# Altium PCB SportsLight.PcbDoc
Units mm, origin at the board's own origin, x right, y up, seen from the top; angles counter-clockwise.
Board outline 49.5 x 30 mm, 2 copper layers (Top Layer, Bottom Layer); 64 components, 41 nets, 217 pads, 71 vias.
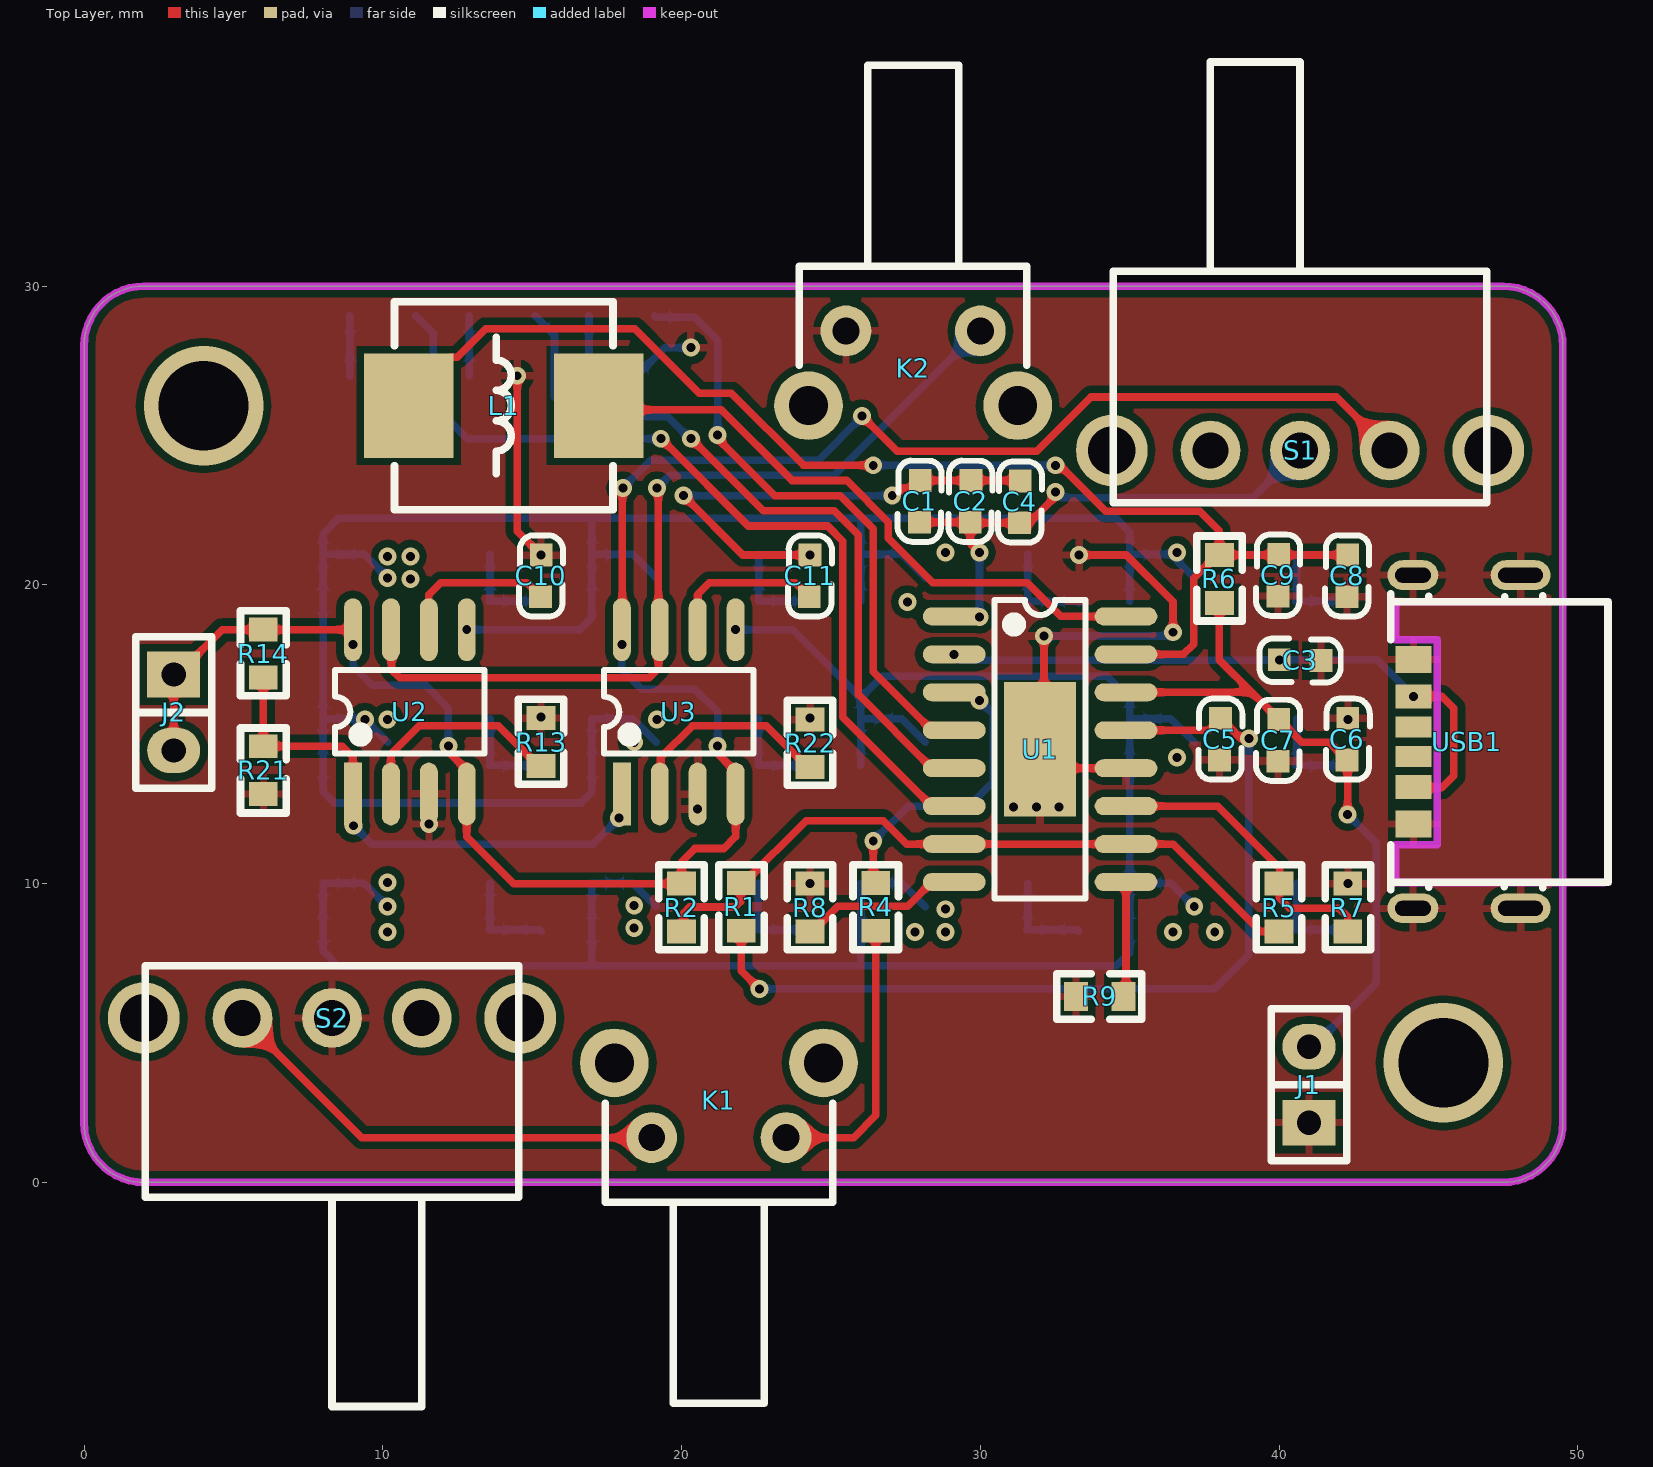
[diagram p0: Top Layer view]
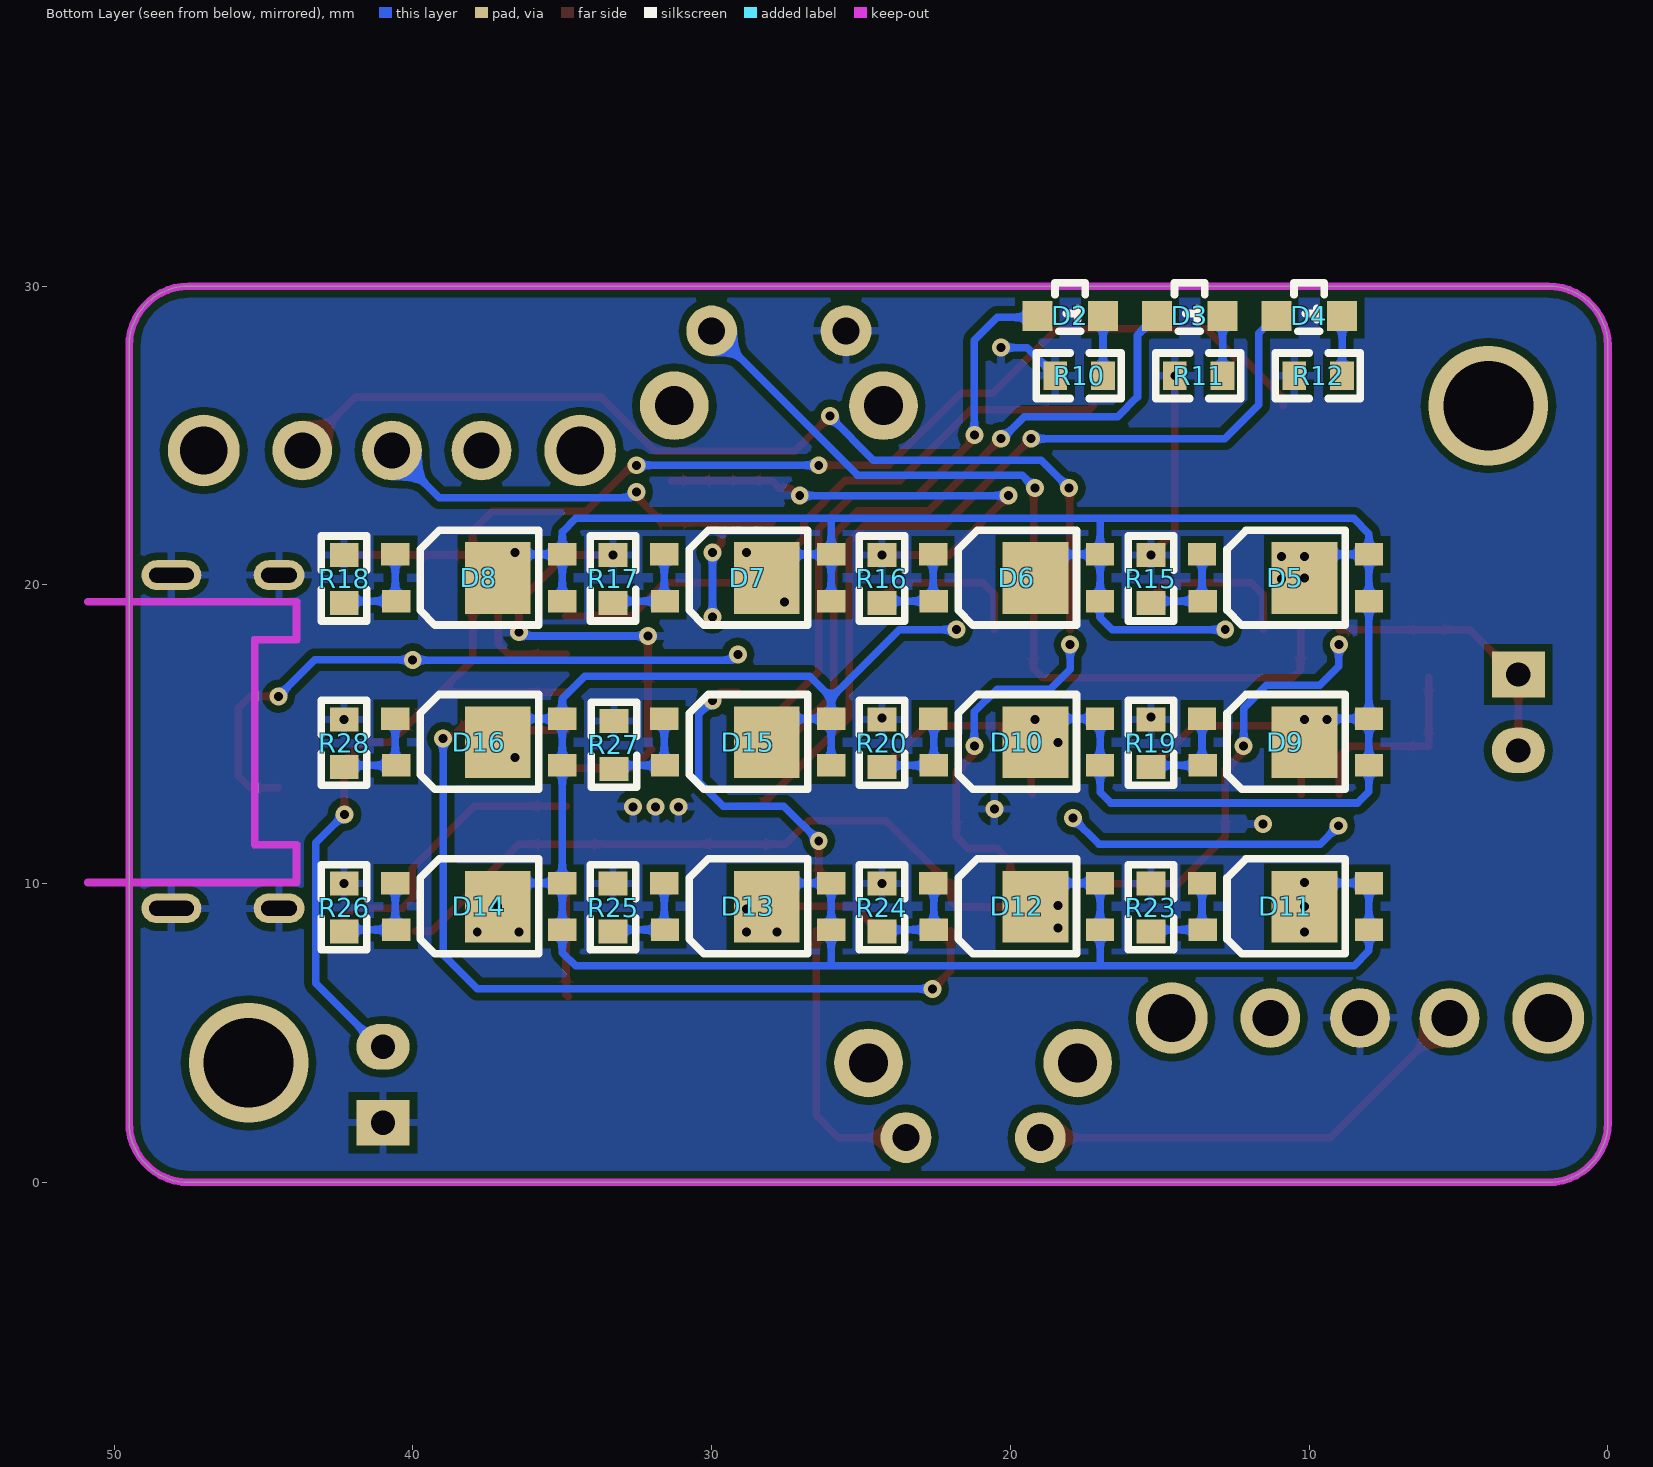
[diagram p1: Bottom Layer view, seen from below]
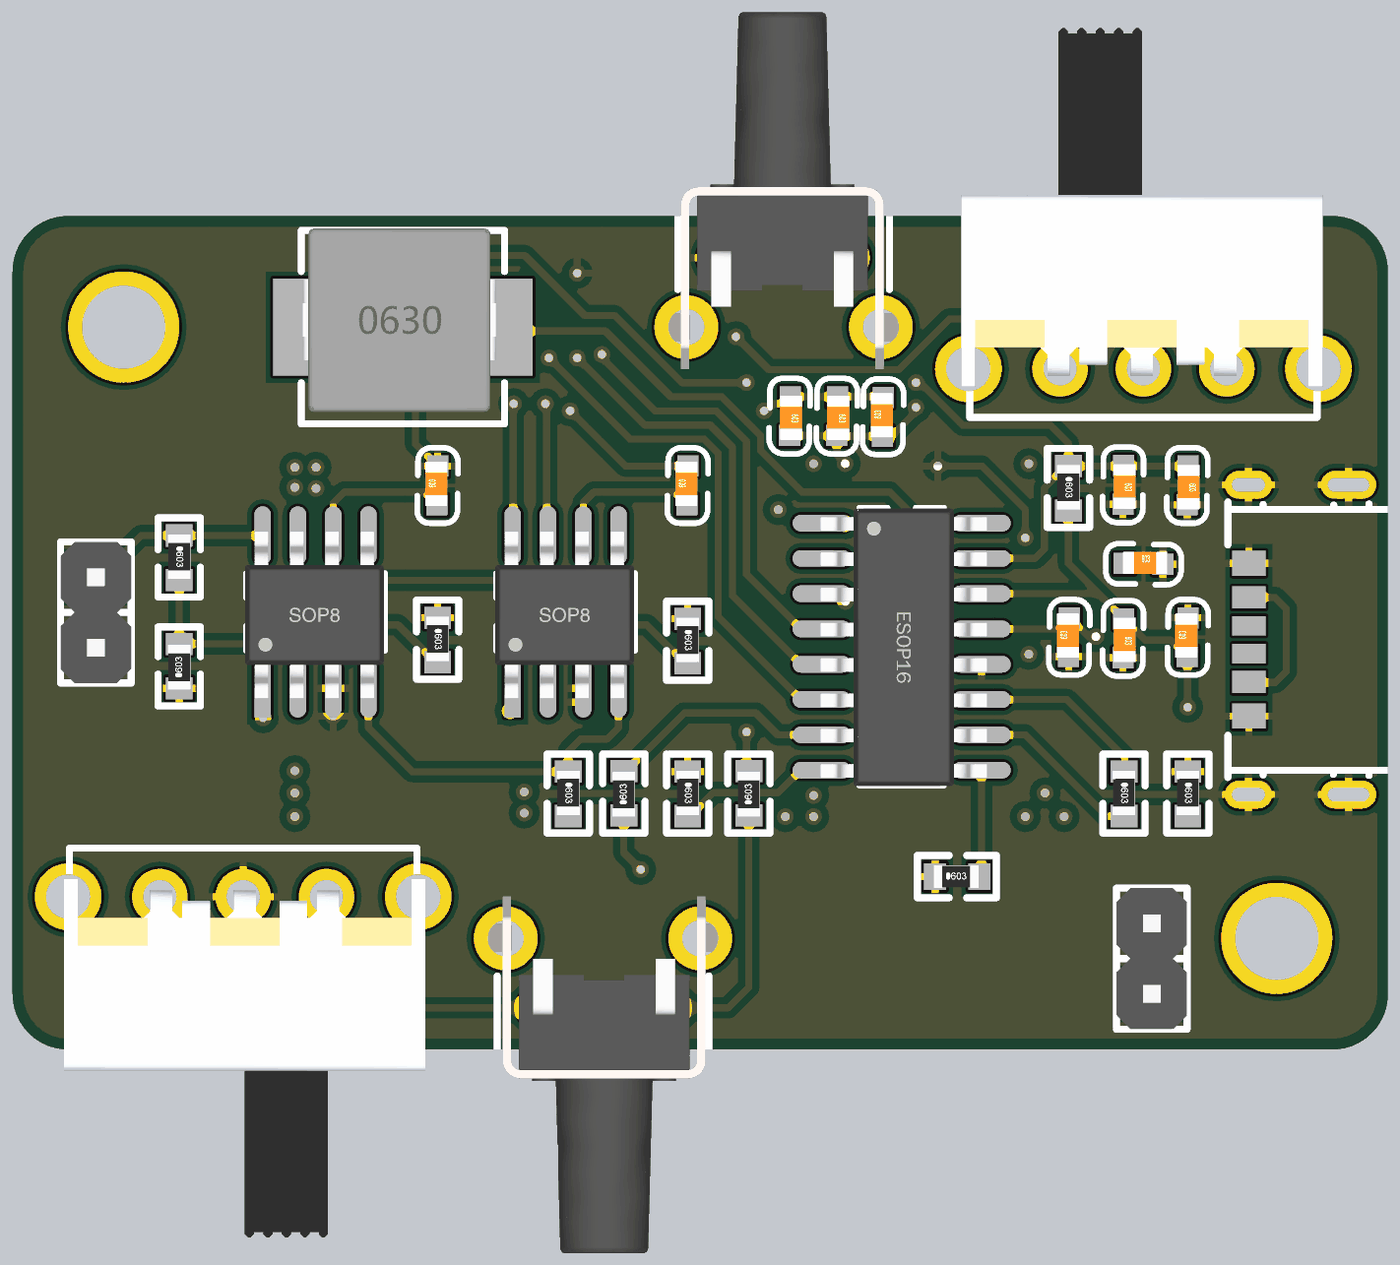
[diagram p2: 3D render of the assembled board from above, using the file's embedded part models]
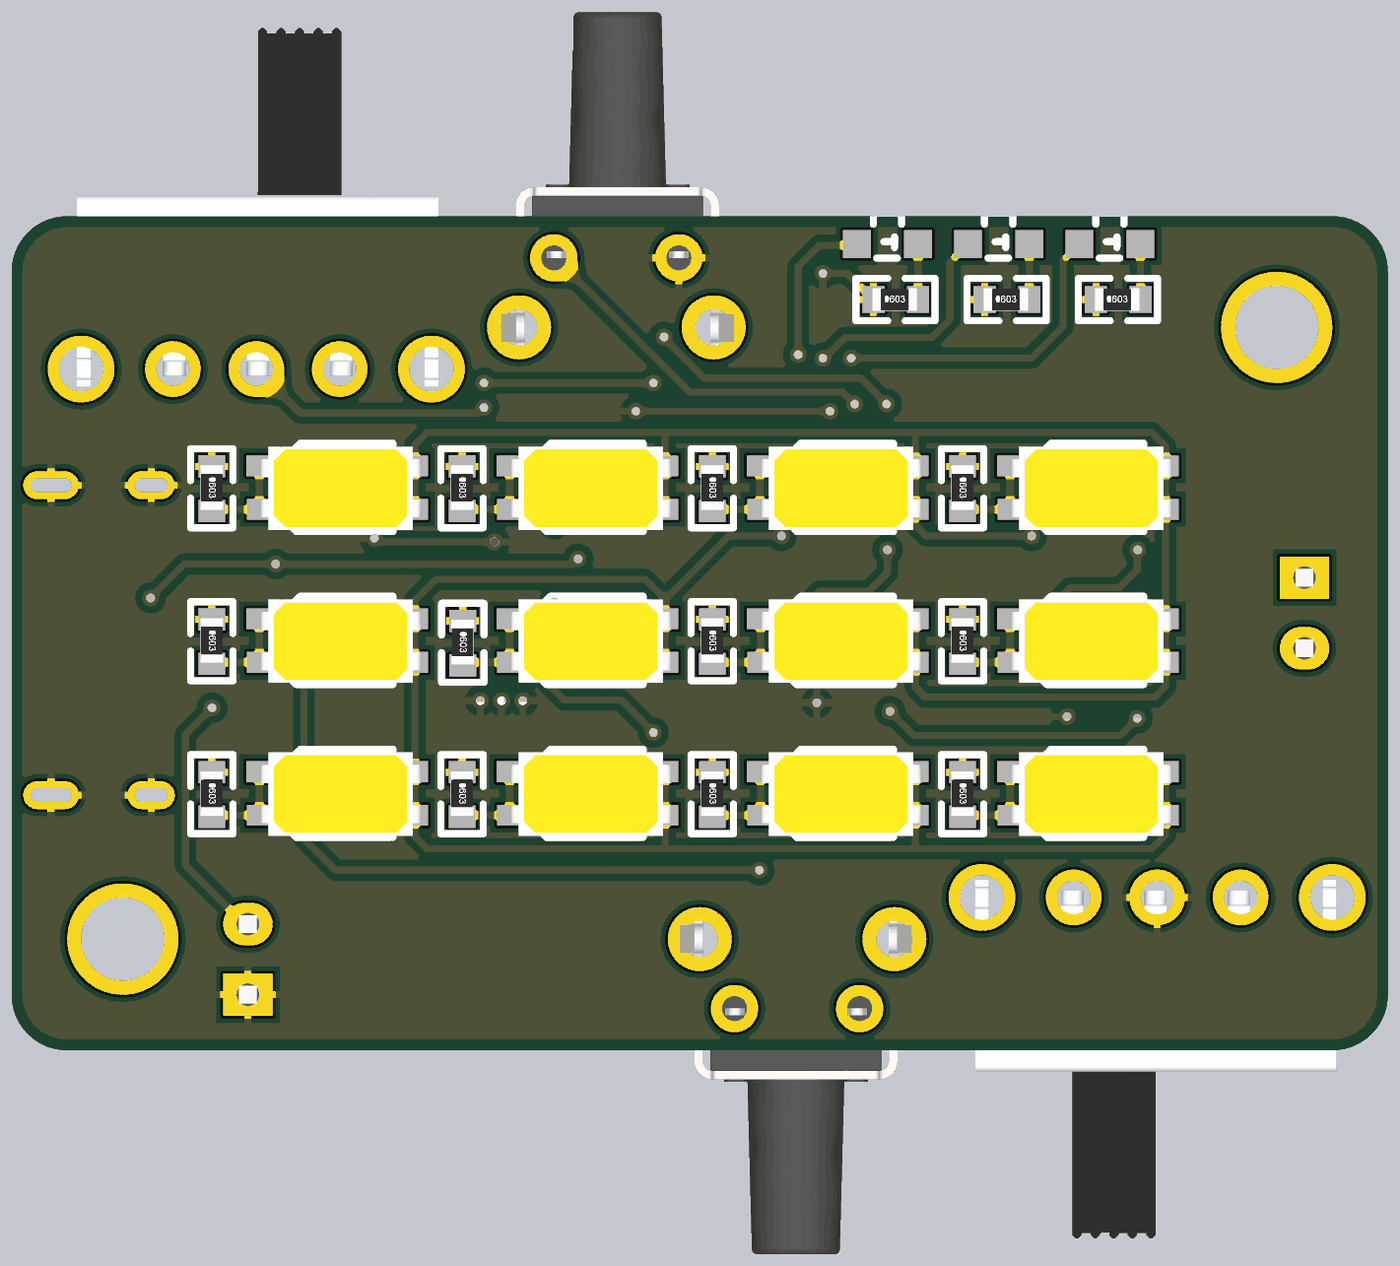
[diagram p3: 3D render of the assembled board from below, using the file's embedded part models]

## Layer stack, top to bottom
Top Solder: solder mask 0.0102, Solder Resist, Dk 3.5
Top Layer: signal copper 0.0356
Dielectric 1: dielectric 0.32, FR-4, Dk 4.8
Bottom Layer: signal copper 0.0356
Bottom Solder: solder mask 0.0102, Solder Resist, Dk 3.5

## Board outline
0,2 0,28 cw(c2,28) 2,30 47.5,30 cw(c47.5,28) 49.5,28 49.5,2 cw(c47.5,2) 47.5,0 2,0 cw(c2,2)

## Design rules (kind name [scope] priority, off if disabled: settings)
Clearance [All] p1: gap=0.254 ignorepadtopadclearanceinfootprint=FALSE except(0: Arc-Hole Track-Hole SMDPad-Hole THPad-Hole Via-Hole Fill-Hole Poly-Hole Region-Hole Text-Hole)
DiffPairsRouting [All] p1: maxlimit=0.254 minlimit=0.089 mostfreqgap=0.254 toplayer_minwidth=0.089 toplayer_maxwidth=0.381 toplayer_prefwidth=0.381 bottomlayer_minwidth=0.089 bottomlayer_maxwidth=0.381 bottomlayer_prefwidth=0.381 maxuncoupledlength=12.7
HoleSize [All] p1: absolutevalues=TRUE maxlimit=6.3 minlimit=0.2 maxpercent=80.000 minpercent=20.000
MinimumSolderMaskSliver [All] p1: minsoldermaskwidth=0
NetAntennae [InNet('No Net')] p1: netantennaetolerance=0
PolygonConnect [All] p1: connectstyle=Relief reliefconductorwidth=0.254 reliefentries=4 polygonreliefangle="90 Angle" airgapwidth=0.254
RoutingVias [All] p1: holewidth=0.711 width=1.27 viastyle="Through Hole" minholewidth=0.3 minwidth=0.5 maxholewidth=6.3 maxwidth=6.5
SilkToSolderMaskClearance [IsPad] p1: minsilkscreentomaskgap=0 clearancetoexposedcopper=TRUE
SolderMaskExpansion [All] p1: expansion=0.102
Width [All] p1: maxlimit=0.762 minlimit=0.089 preferedwidth=0.254
25 further rules are at their usual default settings.

## Components (designator, comment, footprint, x,y, rotation, side; value= is the part's Value field where it differs from the comment)
C1 "22uF" 0603C 28,23.5 r270 top locked
C2 "22uF" 0603C 29.7,23.5 r270 top
C3 "10uF" 0603C 40,17.5 r0 top
C4 "10uF" 0603C 31.3,22.071 r90 top locked
C5 "2.2uF" 0603C 38,14.136 r90 top locked
C6 "10uF" 0603C 42.266,14.136 r90 top
C7 "0.1uF" 0603C 40,15.5 r270 top locked
C8 "0.1uF" 0603C 42.309,21.005 r270 top
C9 "10uF" 0603C 40,21.024 r270 top
C10 "MODE" 0603C 15.266,19.598 r90 top
C11 "MODE" 0603C 24.266,19.598 r90 top
D2 "LED" LED-0602-RD 18,29 r180 bottom locked
D3 "LED" LED-0602-RD 14,29 r180 bottom locked
D4 "LED" LED-0602-RD 10,29 r180 bottom locked
D5 "LED-5630" LED-5630W 8,21 r180 bottom locked
D6 "LED-5630" LED-5630W 17,21 r180 bottom locked
D7 "LED-5630" LED-5630W 26,21 r180 bottom locked
D8 "LED-5630" LED-5630W 35,21 r180 bottom locked
D9 "LED-5630" LED-5630W 8,15.5 r180 bottom locked
D10 "LED-5630" LED-5630W 17,15.5 r180 bottom locked
D11 "LED-5630" LED-5630W 8,10 r180 bottom locked
D12 "LED-5630" LED-5630W 17,10 r180 bottom locked
D13 "LED-5630" LED-5630W 26,10 r180 bottom locked
D14 "LED-5630" LED-5630W 35,10 r180 bottom locked
D15 "LED-5630" LED-5630W 26,15.5 r180 bottom locked
D16 "LED-5630" LED-5630W 35,15.5 r180 bottom locked
J1 "BAT" "Pin HDR1X2/2.54mm-S" 41,2 r180 top
J2 "CE" "Pin HDR1X2/2.54mm-S" 3,17 r0 top locked
K1 "KEY" DIP-6X6X10_C 19,1.5 r0 top locked
K2 "KEY" DIP-6X6X10_C 30,28.5 r180 top locked
L1 "1uH" 0630L 11,26 r0 top locked
R1 "0R" 0603R 22,8.425 r90 top
R2 "0R" 0603R 20,10 r270 top
R4 "10K" 0603R 26.5,8.425 r90 top locked
R5 "MODE" 0603R 40,10 r270 top locked
R6 "10mR" 0603R 38,21 r270 top locked
R7 "MODE" 0603R 42.3,10 r270 top
R8 "MODE" 0603R 24.3,10 r270 top
R9 "MODE" 0603R 33.198,6.223 r0 top
R10 "100R" 0603R 18.5,27 r180 bottom locked
R11 "100R" 0603R 14.5,27 r180 bottom locked
R12 "100R" 0603R 10.5,27 r180 bottom locked
R13 "MODE" 0603R 15.3,15.538 r270 top
R14 "MODE" 0603R 6,18.5 r270 top locked
R15 "MODE" 0603R 15.3,21 r270 bottom locked
R16 "MODE" 0603R 24.3,21 r270 bottom locked
R17 "MODE" 0603R 33.3,21 r270 bottom locked
R18 "MODE" 0603R 42.3,21 r270 bottom locked
R19 "MODE" 0603R 15.3,15.5 r270 bottom locked
R20 "MODE" 0603R 24.3,15.5 r270 bottom locked
R21 "MODE" 0603R 6,13 r90 top locked
R22 "MODE" 0603R 24.3,15.5 r270 top
R23 "MODE" 0603R 15.3,10 r270 bottom locked
R24 "MODE" 0603R 24.3,10 r270 bottom locked
R25 "MODE" 0603R 33.3,10 r270 bottom locked
R26 "MODE" 0603R 42.3,10 r270 bottom locked
R27 "MODE" 0603R 33.274,15.443 r270 bottom
R28 "MODE" 0603R 42.3,15.5 r270 bottom locked
S1 "SS-12F23" SS-12F23 47,24.5 r180 top locked
S2 "SS-12F23" SS-12F23 2,5.5 r0 top locked
U1 "IP5506" ESOP16 32,14.5 r0 top locked
U2 "CN5730" SOP8 9,13 r90 top locked
U3 "CN5730" SOP8 18,13 r90 top locked
USB1 "USB-C 6P CB0.8(073)" USB-C-SMD_TYPE-C-6P-CB0.8-073 44.5,12 r90 top locked

## Footprints (in the part's own frame and the unit in brackets; to place one, negate y for a bottom-side part, rotate by r counter-clockwise, add the part's x,y. Pads: shape width x height; smd on the part's side, far side on the other; paste and mask are expansions set on the pad)
0603C [mil]
  rect 30x30 smd: 1(0.21,-0.35) 2(55.21,-1.35)
  silkscreen extent -26,-30 81,28, body extent -1,-15 62,17, height 12
0603R [mm]
  rect 0.8x0.965 smd: 1(0,0) 2(1.6,0)
  silkscreen extent -0.64,-0.76 2.21,0.76, body extent -0.04,-0.41 1.56,0.41, height 0.45
0630L [mm]
  rect 3x3.5 smd: 1(-0.127,0) 2(6.223,0)
  silkscreen extent -0.61,-3.48 6.71,3.48, body extent -0.55,-3.05 6.4,3.55, height 3.05
DIP-6X6X10_C [mm]
  round 2.3 hole 1.3: 0(-1.25,2.5) 0(5.75,2.5)
  round 1.7 hole 0.9: 1(0,0) 3(4.5,0)
  silkscreen extent -1.56,-8.89 6.06,1.14, body extent -1.89,-8.84 6.48,4.01, height 7.47
ESOP16 [mm]
  oval 2.1x0.6 smd: 1(-2.875,4.445) 2(-2.875,3.175) 3(-2.875,1.905) 4(-2.875,0.635) 5(-2.875,-0.635) 6(-2.875,-1.905) 7(-2.875,-3.175) 8(-2.875,-4.445) 9(2.875,-4.445) 10(2.875,-3.175) 11(2.875,-1.905) 12(2.875,-0.635) 13(2.875,0.635) 14(2.875,1.905) 15(2.875,3.175) 16(2.875,4.445)
  rect 0.9x0.7 on Top Paste: 10(-0.625,-0.575) 10(-0.625,0.525) 10(-0.625,1.625) 10(0.625,-1.625) 11(-0.65,-1.625) 11(0.65,-0.575) 11(0.65,0.525) 11(0.65,1.625)
  rect 2.4x4.5 smd paste-3: 17(0,0)
  silkscreen extent -1.52,-5 1.52,5, body extent -2.93,-5.03 3.08,4.97, height 1.53
LED-0602-RD [mm]
  rect 1x1 smd: 1(-1.1,0) 2(1.1,0)
  silkscreen extent -0.51,-0.51 0.51,1.11
LED-5630W [mm]
  rect 2.2x2.4 smd: A(-2.159,-0.768)
  rect 0.95x0.75 smd: A(0,-1.543) A(0,0.019) K(-5.588,0.019) K(-5.563,-1.543)
  silkscreen extent -4.75,-2.34 -0.79,0.83, body extent -5.57,-2.29 0.23,0.71, height 0.95
"Pin HDR1X2/2.54mm-S" [mil]
  rect 70x60 hole 32: 1(0,0)
  oval 70x60 hole 32: 2(0,-100)
  silkscreen extent -50,-150 50,50, body extent -50,-150 50,50, height 336
SOP8 [mm]
  rect 2.1x0.6 smd: 1(0,0)
  oval 2.1x0.6 smd: 2(0,-1.27) 3(0,-2.54) 4(0,-3.81) 5(5.5,-3.81) 6(5.5,-2.54) 7(5.5,-1.27) 8(5.5,0)
  silkscreen extent 1.35,-4.41 4.15,0.6, body extent -0.36,-4.37 5.64,0.63, height 1.9
SS-12F23 [mm]
  round 2.4 hole 1.6: 0(0,0) 0(12.6,0)
  round 2 hole 1.2: 1(3.3,0) 2(6.3,0) 3(9.3,0)
  silkscreen extent 0.05,-13 12.55,1.75, body extent -0.14,-12.27 12.86,0.64, height 5.75
USB-C-SMD_TYPE-C-6P-CB0.8-073 [mm]
  rect 0.9x1.2 smd: 1(0,0) 6(5.5,0)
  rect 0.8x1.2 smd: 2(1.23,0) 5(4.27,0)
  rect 0.7x1.2 smd: 3(2.25,0) 4(3.25,0)
  oval 1x1.7 hole 0.5 slot 1.2 at 90 deg: 7(-2.825,0.02) 8(8.325,0.02)
  oval 1x2 hole 0.5 slot 1.5 at 90 deg: 7(-2.825,-3.58) 8(8.325,-3.58)
  Keep-Out Layer lines w0.254: -1.962,-6.38 -1.962,0.605 -0.692,0.605 -0.692,-0.792 6.166,-0.792 6.166,0.605 7.436,0.605 7.436,-6.38
  silkscreen extent -2.21,-6.51 7.71,0.76

## Part data
C1 C2 C3 C4 C5 C6 C7 C8 C9 C10 C11: library part CAP, "无极性电容"
J1 J2: library part "Pin HDR1X2"
L1: library part INDUCTOR, "INDUCTOR"
R1 R2 R4 R5 R6 R7 R10 R11 R12 R13 R14 R15 R16 R17 R18 R19 R20 R21 R22 R23 R24 R25 R26 R27 R28: library part RES
R8: library part RES, "用于设置电池容量"
R9: library part RES, "用于设置按键功能、照明"
U1: "集成数码管驱动的2A充电2.4A放电移动电源SOC"
U2 U3: "LED集成驱动电路"
USB1: BOM_Manufacturer="SHOU HAN(Ê×º", BOM_Manufacturer Part="TYPE-C 6P CB0.8(073)", BOM_Supplier=LCSC, BOM_Supplier Part=C2858273, Contributor=LCSC, spicePre=U, spiceSymbolName="TYPE-C 6P CB0.8(073)"

## Via types
v1: diameter 0.6, hole 0.3, Top Layer to Bottom Layer, 69 vias
v2: diameter 4, hole 3, Top Layer to Bottom Layer, 2 vias

## Nets (pads, with @x,y where several pads share a name; then routed paths per layer and width w, separated by ;. In a path a pad name is that pad's centre, name@x,y a point inside that pad or via, vN(x,y) a via of type N, cw(c..) or ccw(c..) an arc to the next point about the centre after c; other vN are vias at no path point)
BTN: K2.1 U2.7 U3.7 | length 29.6
  Top Layer w0.254: U2.7 10.287,18.483 10.287,17.167 10.563,16.891 18.923,16.891 19.223,17.191 19.223,23.195 v1(19.177,23.241)
  Bottom Layer w0.254: v1(19.177,23.241) 19.604,23.668 25.118,23.668 29.95,28.5 K2.1
CE0: J2.1 J2.2 R2.1 R14.1 S1.1 U2.4 U2.8 U3.4 U3.8 | length 71.4
  Top Layer w0.254: J2.2 J2.1 3.127,17 4.627,18.5 R14.1 U2.8 ; v1(12.192,14.605) 12.192,14.423 12.81,13.805 U2.4 12.81,11.574 14.384,10 R2.1 20,10.729 20.447,11.176 21.407,11.176 21.81,11.579 U3.4 21.81,13.75 21.209,14.351 v1(21.209,14.605) ; U3.8 18.017,18.517 18.017,23.224 v1(18.034,23.241) ; v1(26.035,25.654) 27.22,24.469 31.884,24.469 33.704,26.289 41.911,26.289 S1.1
  Bottom Layer w0.254: v1(9,18) 9.017,17.983 9.017,17.272 9.652,16.637 11.43,16.637 12.192,15.875 v1(12.192,14.605) ; v1(18,18) 18,17.179 18.669,16.51 20.447,16.51 21.209,15.748 v1(21.209,14.605) ; v1(18.034,23.241) 18.969,24.176 24.591,24.176 26.035,25.62 v1(26.035,25.654)
GND: C1.1 C2.1 C3.2 C4.2 C5.1 C6.2 C7.2 C8.2 C9.2 C10.2 C11.2 J1.1 K2.3 R7.1 R8.1 R9.1 R10.1 R11.1 R12.1 R13.1 R15.1 R16.1 R17.1 R18.1 R19.1 R20.1 R21.1 R22.1 R23.1 R24.1 R25.1 R26.1 R27.1 R28.1 S2.2 U1.12 U1.17 U2.3 U3.3 USB1.1 USB1.6 USB1.7 USB1.8 | length 41.3
  Top Layer w0.254: v1(14.5,27) 14.5,21.8 v1(15.3,21) ; v1(20.066,22.987) 22.053,21 v1(24.3,21) ; v1(27.051,22.987) 27.145,22.987 27.398,23.241 27.737,23.241 C1.1 C2.1 31.313,23.495 C4.2 ; v1(32.131,18.288) 32.131,14.631 U1.17 32.635,13.865 U1.12 ; v1(33.3,21) 34.88,21 36.449,19.431 v1(36.449,18.415)
  Bottom Layer w0.254: R10.1 19.44,27.94 v1(20.32,27.94) ; v1(20.066,22.987) v1(27.051,22.987) ; v1(32.131,18.288) 36.322,18.288 v1(36.449,18.415)
  other v1: 24.3,10 42.3,10 11.54,12 20.54,12.5 31.115,12.573 31.877,12.573 32.639,12.573 42.3,15.5 24.3,15.538 15.3,15.576
LED4: D3.1 U1.5 | length 24.6
  Top Layer w0.254: v1(20.32,24.892) 22.733,22.479 25.102,22.479 25.908,21.673 25.908,16.332 28.375,13.865 U1.5
  Bottom Layer w0.254: D3.1 15.748,28.352 15.748,26.289 16.403,25.634 19.535,25.634 20.276,24.892 v1(20.32,24.892)
LED5: D2.1 U1.4 | length 20.5
  Top Layer w0.254: v1(21.209,25.019) 21.209,24.892 23.114,22.987 25.313,22.987 26.416,21.884 26.416,17.094 28.375,15.135 U1.4
  Bottom Layer w0.254: D2.1 19.144,28.956 20.447,28.956 21.209,28.194 v1(21.209,25.019)
MODE: R14.2 R21.2 U2.1 U3.1 | length 16.2
  Top Layer w0.254: R14.2 R21.2 8.641,14.6 9,14.241 U2.1
  Bottom Layer w0.254: v1(9.017,11.938) 9.636,11.319 17.034,11.319 v1(17.907,12.192)
NetC1_2: C1.2 C2.2 C4.1 S1.2 U1.1 | length 17.3
  Top Layer w0.254: C1.2 C2.2 ; v1(29.966,21.088) 29.966,21.097 29.666,21.397 C2.2 ; v1(32.512,23.114) 32.512,22.948 31.641,22.076 C4.1 29.687,22.076 C2.2
  Bottom Layer w0.254: v1(29.966,21.088) 29.972,21.082 v1(29.972,18.923) ; v1(32.512,23.114) 32.707,22.919 39.119,22.919 S1.2
NetC6_1: C6.1 C7.1 J1.2 R6.2 U1.14 | length 22.8
  Top Layer w0.254: U1.14 39.081,16.405 ; R6.2 38,17.486 39.081,16.405 ; v1(42.291,12.319) 42.291,14.125 C6.1 41.684,14.732 40.754,14.732 C7.1 39.081,16.405
  Bottom Layer w0.254: J1.2 41.127,4.54 43.249,6.662 43.249,11.361 v1(42.291,12.319)
NetC8_1: C8.1 C9.1 L1.1 R6.1 U1.15 | length 42.1
  Top Layer w0.254: L1.1 10.873,26.25 12.246,27.623 12.496,27.623 13.448,28.575 18.437,28.575 20.596,26.416 21.669,26.416 24.082,24.003 v1(26.416,24.003) ; v1(32.512,24.003) 32.661,24.003 34.194,22.47 37.347,22.47 38,21.817 R6.1 ; U1.15 36.799,17.675 37.137,18.012 37.137,20.219 37.918,21 R6.1 ; C8.1 R6.1
  Bottom Layer w0.254: v1(26.416,24.003) v1(32.512,24.003)
NetC10_1: C10.1 U2.6 | length 5.3
  Top Layer w0.254: U2.6 11.54,19.668 11.938,20.066 14.812,20.066 C10.1
NetC11_1: C11.1 U3.6 | length 5.3
  Top Layer w0.254: U3.6 20.54,19.685 20.921,20.066 23.812,20.066 C11.1
NetD2_K: D2.2 R10.2 | length 2
  Bottom Layer w0.254: R10.2 D2.2
NetD3_K: D3.2 R11.2 | length 2
  Bottom Layer w0.254: R11.2 D3.2
NetD4_A: D4.1 U1.6 | length 29.5
  Top Layer w0.254: v1@19.436,24.77 22.234,21.971 24.892,21.971 25.4,21.463 25.4,15.57 28.375,12.595 U1.6
  Bottom Layer w0.254: D4.1 11.684,28.416 11.684,26.035 12.827,24.892 v1(19.304,24.892)
NetD4_K: D4.2 R12.2 | length 2
  Bottom Layer w0.254: R12.2 D4.2
NetD5_A: D5.A D6.A D7.A D8.A D9.A D10.A U2.5 | length 75.5
  Bottom Layer w0.254: D9.A@10.159,14.732 9.372,15.519 D9.A@8,15.519 ; v1(10.159,20.232) 9.372,21.019 D5.A@8,21.019 ; v1(12.81,18.5) 16.595,18.5 17,18.905 17,19.457 D6.A@17,21.019 ; D10.A@19.159,14.732 18.372,15.519 17,15.519 17,13.957 17,13.063 16.637,12.7 8.382,12.7 8,13.082 8,13.957 D9.A@8,15.519 ; D6.A@19.159,20.232 18.372,21.019 D6.A@17,21.019 ; D7.A@26,19.457 D7.A@26,21.019 ; D7.A@28.159,20.232 27.372,21.019 D7.A@26,21.019 ; D8.A@35,19.457 D8.A@35,21.019 ; D8.A@37.159,20.232 36.372,21.019 D8.A@35,21.019 ; D9.A@8,15.519 8,19.457 D5.A@8,21.019 ; D5.A@8,21.019 8,21.716 8.509,22.225 17.018,22.225 ; D6.A@17,21.019 17,22.207 17.018,22.225 ; 17.018,22.225 25.965,22.225 26,22.19 ; D7.A@26,21.019 26,22.19 ; 26,22.19 26.035,22.225 34.544,22.225 35,21.769 D8.A@35,21.019
  other v1: 18.415,14.732 9.398,15.494 10.16,15.494 19.177,15.494 27.559,19.431 10.922,20.193 10.16,20.955 10.922,20.955 28.829,21.082 36.576,21.082
NetD5_K: D5.K R15.2 | length 3.3
  Bottom Layer w0.254: D5.K@13.588,21.019 13.588,19.482 13.563,19.457 15.243,19.457 R15.2
NetD6_K: D6.K R16.2 | length 3.3
  Bottom Layer w0.254: D6.K@22.588,21.019 22.588,19.482 22.563,19.457 24.243,19.457 R16.2
NetD7_K: D7.K R17.2 | length 3.3
  Bottom Layer w0.254: D7.K@31.588,21.019 31.588,19.482 31.563,19.457 33.243,19.457 R17.2
NetD8_K: D8.K R18.2 | length 3.3
  Bottom Layer w0.254: D8.K@40.588,21.019 40.588,19.482 40.563,19.457 42.243,19.457 R18.2
NetD9_K: D9.K R19.2 | length 3.3
  Bottom Layer w0.254: D9.K@13.588,15.519 13.588,13.982 13.563,13.957 15.243,13.957 R19.2
NetD10_K: D10.K R20.2 | length 3.3
  Bottom Layer w0.254: D10.K@22.588,15.519 22.563,15.494 22.563,13.957 24.243,13.957 R20.2
NetD11_A: D11.A D12.A D13.A D14.A D15.A D16.A U3.5 | length 75.6
  Bottom Layer w0.254: v1(10.159,9.232) 9.372,10.019 8,10.019 8,8.457 8,7.748 8.498,7.25 17.018,7.25 ; D12.A@19.159,9.232 18.372,10.019 17,10.019 17,8.457 17,7.268 17.018,7.25 ; v1(21.81,18.5) 23.721,18.5 26,16.221 ; D15.A@26,13.957 D15.A@26,15.519 ; D13.A@28.159,9.232 27.372,10.019 26,10.019 26,8.457 26,7.285 26.035,7.25 ; D15.A@28.159,14.732 27.372,15.519 D15.A@26,15.519 ; v1(37.159,9.232) 36.372,10.019 D14.A@35,10.019 ; D16.A@37.159,14.732 36.372,15.519 D16.A@35,15.519 ; 17.018,7.25 26.035,7.25 ; D15.A@26,15.519 26,16.221 ; 26,16.221 26.716,16.937 34.244,16.937 35,16.181 D16.A@35,15.519 ; 26.035,7.25 34.555,7.25 35,7.695 35,8.457 D14.A@35,10.019 ; D14.A@35,10.019 35,13.957 D16.A@35,15.519
  other v1: 10.159,8.382 27.813,8.382 28.829,8.382 36.449,8.382 37.846,8.382 18.415,8.509 28.829,9.144 18.415,9.271 10.159,10.033 36.576,14.224
NetD11_K: D11.K R23.2 | length 3.3
  Bottom Layer w0.254: D11.K@13.588,10.019 13.588,8.482 13.563,8.457 15.243,8.457 R23.2
NetD12_K: D12.K R24.2 | length 3.3
  Bottom Layer w0.254: D12.K@22.588,10.019 22.563,9.994 22.563,8.457 24.243,8.457 R24.2
NetD13_K: D13.K R25.2 | length 3.3
  Bottom Layer w0.254: D13.K@31.588,10.019 31.588,8.482 31.563,8.457 33.243,8.457 R25.2
NetD14_K: D14.K R26.2 | length 3.3
  Bottom Layer w0.254: D14.K@40.588,10.019 40.588,8.482 40.563,8.457 42.243,8.457 R26.2
NetD15_K: D15.K R27.2 | length 3.3
  Bottom Layer w0.254: D15.K@31.588,15.519 31.588,13.982 31.563,13.957 33.16,13.957 R27.2
NetD16_K: D16.K R28.2 | length 3.3
  Bottom Layer w0.254: D16.K@40.588,15.519 40.588,13.982 40.563,13.957 42.243,13.957 R28.2
NetK1_1: K1.1 S2.1 | length 15.4
  Top Layer w0.254: S2.1 9.3,1.5 K1.1
NetK1_3: K1.3 R4.1 | length 9.5
  Top Layer w0.254: K1.3 25.757,1.5 26.5,2.243 R4.1
NetL1_2: L1.2 U1.16 | length 20.9
  Top Layer w0.254: L1.2 17.361,25.862 21.329,25.862 23.696,23.495 25.523,23.495 26.924,22.094 26.924,21.555 28.413,20.066 31.57,20.066 32.691,18.945 U1.16
NetR4_2: R4.2 U1.3 | length 10.2
  Top Layer w0.254: v1(26.416,11.43) 26.416,10.109 R4.2 ; U1.3 29.702,16.405 29.972,16.135 v1(29.972,16.129)
  Bottom Layer w0.254: v1(26.416,11.43) 27.581,12.595 29.613,12.595 30.434,13.416 30.434,15.673 v1@29.972,16.135
NetR5_1: R5.1 R7.2 U1.11@34.875,12.595 | length 10.1
  Top Layer w0.254: U1.11@34.875,12.595 37.951,12.595 40.027,10.519 40.027,9.792 40,9.765 40,9.53 40.349,9.181 42,9.181 42.291,8.89 42.291,8.409 R7.2
NetR8_2: R8.2 U1.8 | length 5.5
  Top Layer w0.254: R8.2 24.382,8.4 25.227,9.244 27.564,9.244 28.375,10.055 U1.8
NetR9_2: R9.2 U1.9 | length 3.9
  Top Layer w0.254: R9.2 34.875,6.3 U1.9
NetR13_2: R13.2 U2.2 | length 7.3
  Top Layer w0.254: U2.2 10.27,14.334 11.222,15.286 13.869,15.286 15.218,13.938 R13.2
NetR22_2: R22.2 U3.2 | length 7.2
  Top Layer w0.254: U3.2 19.304,13.034 19.304,14.224 20.366,15.286 22.832,15.286 24.218,13.9 R22.2
VBUS: C3.1 U1.2 USB1.2 USB1.5 | length 21.3
  Top Layer w0.254: USB1.2 44.522,13.208 45.444,13.208 45.847,13.611 45.847,15.867 45.444,16.27 v1(44.5,16.27)
  Bottom Layer w0.254: v1(29.125,17.675) 29.32,17.48 39.994,17.48 v1(40.005,17.491) 43.279,17.491 v1(44.5,16.27)
VCC: C5.2 R1.1 U1.13 | length 30.9
  Top Layer w0.254: R1.1 22,7.083 v1(22.606,6.477) ; U1.13 37.631,15.135 C5.2 38.714,14.859 v1(38.989,14.859)
  Bottom Layer w0.254: v1(22.606,6.477) 37.846,6.477 38.989,7.62 v1(38.989,14.859)
VCCX: R1.2 R2.2 R5.2 U1.7 U1.10@34.875,11.325 | length 23.7
  Top Layer w0.254: R2.2 20.066,8.466 20.066,9.017 20.268,9.219 21.792,9.219 21.971,9.398 21.971,9.996 R1.2 22.082,10.025 24.168,12.111 26.751,12.111 27.537,11.325 U1.7 34.875,11.325 36.449,11.325 39.374,8.4 R5.2@39.917,8.4
pads on no net: K1.0 K2.0 S1.0 S1.3 S2.0 S2.3 U1.10@31.375,13.925 U1.10@31.375,15.025 U1.10@31.375,16.125 U1.10@32.625,12.875 U1.11@31.35,12.875 U1.11@32.65,13.925 U1.11@32.65,15.025 U1.11@32.65,16.125 USB1.3 USB1.4
copper on no net:
  other v2: 45.5,4 4,26

## Polygon pours and split planes (outlines as drawn)
GND on Top Layer "Top Layer-No Net" (solid, pour order 2): 0,0 0,30 49.5,30 49.5,0
GND on Bottom Layer "Top Layer-No Net1" (solid, pour order 3): 0,0 0,30 49.5,30 49.5,0

## Keep-outs
Keep-Out Layer:
  the board outline again, w0.254